# Altium PCB ArduinoDevBoard-v2.PcbDoc
Units mm, origin at the board's own origin, x right, y up, seen from the top; angles counter-clockwise.
Board outline 100 x 70 mm, 2 copper layers (Top Layer, Bottom Layer); 39 components, 34 nets, 129 pads, 0 vias.
Unrouted connection lines stored in the file: 49.
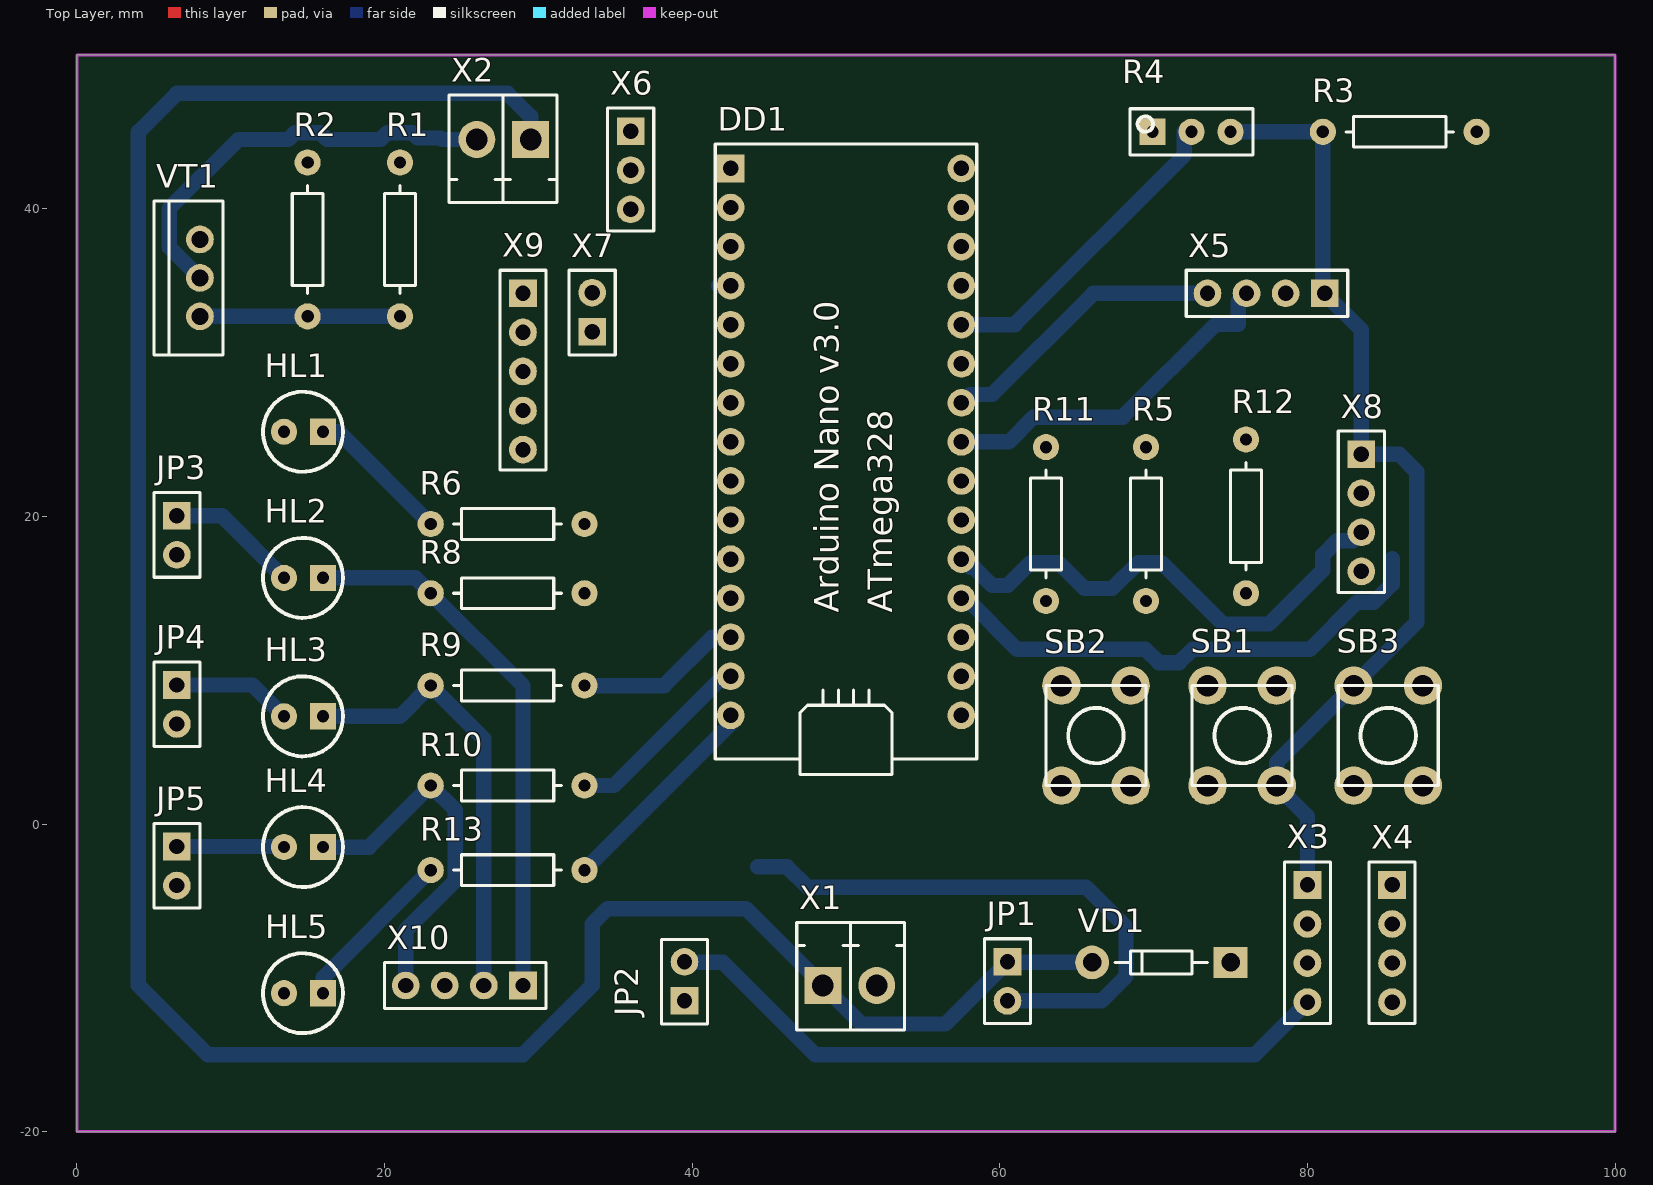
[diagram p0: Top Layer view]
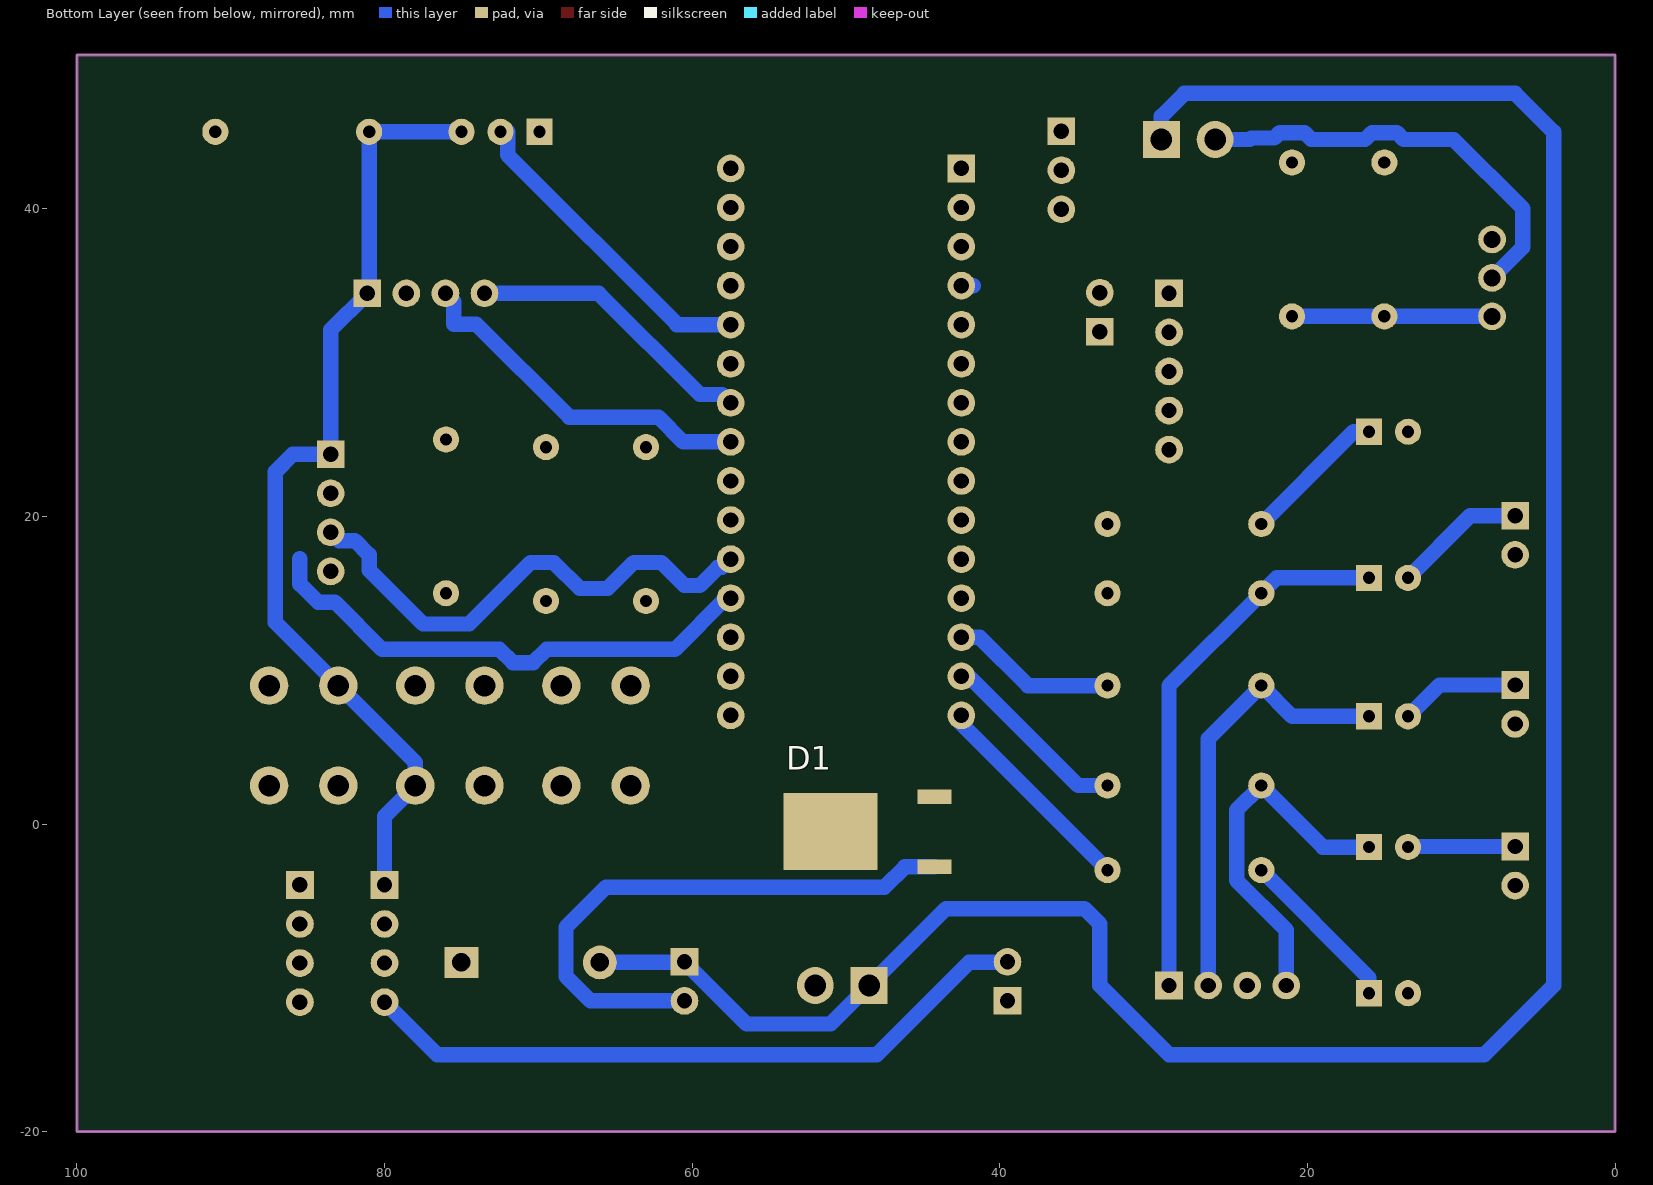
[diagram p1: Bottom Layer view, seen from below]

## Layer stack, top to bottom
Top Solder: solder mask 0.0102, Solder Resist, Dk 3.5
Top Layer: signal copper 0.0356
Dielectric 1: dielectric 0.32, FR-4, Dk 4.8
Bottom Layer: signal copper 0.0356
Bottom Solder: solder mask 0.0102, Solder Resist, Dk 3.5

## Board outline
0,-20 100,-20 100,50 0,50

## Design rules (kind name [scope] priority, off if disabled: settings)
Clearance [All] p1: gap=0.6 ignorepadtopadclearanceinfootprint=FALSE
PolygonConnect [All] p1: connectstyle=Relief reliefconductorwidth=0.254 reliefentries=4 polygonreliefangle="90 Angle" airgapwidth=0.254
RoutingVias [All] p1: holewidth=0.711 width=1.27 viastyle="Through Hole" minholewidth=0.711 minwidth=1.27 maxholewidth=0.711 maxwidth=1.27
SolderMaskExpansion [All] p1: expansion=0.102
Width [All] p1: maxlimit=1.2 minlimit=0.6 preferedwidth=1 toplayer_maxwidth=1 bottomlayer_minwidth=0.8 minimp=50.000000 maximp=50.000000 favimp=50.000000
30 further rules are at their usual default settings.

## Components (designator, comment, footprint, x,y, rotation, side; value= is the part's Value field where it differs from the comment)
D1 "L78M05" D-PAK 48.6,-0.5 r0 bottom
DD1 "ADUINO-NANO-V3.0-328" ARDUINO_NANO_V3.0 42.5,42.72 r0 top
HL1 "*" "Led Diode 5mm" 16,25.5 r180 top
HL2 "*" "Led Diode 5mm" 16,16 r180 top
HL3 "*" "Led Diode 5mm" 16,7 r180 top
HL4 "*" "Led Diode 5mm" 16,-1.5 r180 top
HL5 "*" "Led Diode 5mm" 16,-11 r180 top
JP1 "Jumper" PLS-2 60.5,-8.96 r270 top
JP2 "Jumper" PLS-2 39.5,-11.5 r90 top
JP3 "Jumper" PLS-2 6.5,20.04 r270 top
JP4 "Jumper" PLS-2 6.5,9.04 r270 top
JP5 "Jumper" PLS-2 6.5,-1.46 r270 top
R1 "100R" Resistor-0.25W 21,33 r90 top
R2 "1k" Resistor-0.25W 15,33 r90 top
R3 "4.7K" Resistor-0.25W 91,45 r180 top
R4 "1k" 3296W_Resistor 72.46,45 r0 top
R5 "10k" Resistor-0.25W 69.5,24.5 r270 top
R6 "100R" Resistor-0.25W 33,19.5 r180 top value=240R
R8 "100R" Resistor-0.25W 33,15 r180 top value=240R
R9 "100R" Resistor-0.25W 33,9 r180 top value=240R
R10 "100R" Resistor-0.25W 33,2.5 r180 top value=240R
R11 "10k" Resistor-0.25W 63,24.5 r270 top
R12 "10k" Resistor-0.25W 76,25 r270 top
R13 "100R" Resistor-0.25W 33,-3 r180 top value=240R
SB1 "*" KLS7-TS6601-5.0-180 73.5,2.5 r90 top
SB2 "*" KLS7-TS6601-5.0-180 68.5,9 r270 top
SB3 "*" KLS7-TS6601-5.0-180 87.5,9 r270 top
VD1 "1N4007" "Diode (DO41)" 70.5,-9 r180 top
VT1 "TIP122" TO220 8,35.5 r270 top
X1 "15EDGVC-3.5-2P" 15EDGVC-3.5-2P 48.5,-10.5 r0 top
X2 "15EDGVC-3.5-2P" 15EDGVC-3.5-2P 29.5,44.5 r180 top
X3 "PLS-4" PLS-4 80,-3.96 r270 top
X4 "PLS-4" PLS-4 85.5,-3.96 r270 top
X5 "PLS-4" PLS-4 81.12,34.5 r180 top
X6 "15EDGVC-3.5-3P" PLS-3 36,45.04 r270 top
X7 "*" PLS-2 33.5,32 r90 top
X8 "*" PLS-4 83.5,24.04 r270 top
X9 "*" PLS-5 29,34.5 r270 top
X10 "*" PLS-4 29,-10.5 r180 top

## Footprints (in the part's own frame and the unit in brackets; to place one, negate y for a bottom-side part, rotate by r counter-clockwise, add the part's x,y. Pads: shape width x height; smd on the part's side, far side on the other; paste and mask are expansions set on the pad)
15EDGVC-3.5-2P [mm]
  rect 2.4x2.4 hole 1.4 unplated: 1(0,0)
  round 2.4 hole 1.4: 2(3.5,0)
  silkscreen extent -1.7,-2.9 5.3,4.1
3296W_Resistor [mm]
  rect 1.7x1.7 hole 0.8: 1(-2.54,0)
  round 1.7 hole 0.8: 2(0,0) 3(2.54,0)
  silkscreen extent -4,-1.5 4,1.5, body extent -4.76,-2.4 4.77,2.4, height 11.55
ARDUINO_NANO_V3.0 [mm]
  rect 1.8x1.8 hole 1: 1(0,-0.1)
  round 1.8 hole 1: 2(0,-2.64) 3(0,-5.18) 4(0,-7.72) 5(0,-10.26) 6(0,-12.8) 7(0,-15.34) 8(0,-17.88) 9(0,-20.42) 10(0,-22.96) 11(0,-25.5) 12(0,-28.04) 13(0,-30.58) 14(0,-33.12) 15(0,-35.66) 16(15,-35.66) 17(15,-33.12) 18(15,-30.58) 19(15,-28.04) 20(15,-25.5) 21(15,-22.96) 22(15,-20.42) 23(15,-17.88) 24(15,-15.34) 25(15,-12.8) 26(15,-10.26) 27(15,-7.72) 28(15,-5.18) 29(15,-2.64) 30(15,-0.1)
  silkscreen extent -1,-39.5 16,1.5
D-PAK [mm] "TO-252AA"
  rect 2.2x0.95 smd: 1(-4.35,2.28) 2(-4.35,-2.28)
  rect 6.1x5 smd: 3(2.4,0)
  body extent -4.6,-3.25 5.3,3.25, height 2.5
"Diode (DO41)" [mm]
  rect 2.2x2 hole 1.2: 1(-4.5,0)
  round 2.2 hole 1.2: 2(4.5,0)
  silkscreen extent -3,-0.75 3,0.75
KLS7-TS6601-5.0-180 [mm]
  round 2.5 hole 1.4: 1(0,0) 2(6.5,0) 3(0,-4.5) 4(6.5,-4.5)
  silkscreen extent 0,-5.5 6.5,1
"Led Diode 5mm" [mm]
  rect 1.7x1.7 hole 0.8: 1(0,0)
  round 1.7 hole 0.8: 2(2.54,0)
  silkscreen extent -1.3,-2.6 3.9,2.6, body extent -1.5,-2.8 3.89,3, height 8.5
PLS-2 [mm]
  rect 1.8x1.8 hole 1: 1(0,0)
  round 1.8 hole 1: 2(2.54,0)
  silkscreen extent -1.5,-1.5 4,1.5, body extent -1.29,-1.25 3.79,1.29, height 8.54
PLS-3 [mm]
  rect 1.8x1.8 hole 1: 1(0,0)
  round 1.8 hole 1: 2(2.54,0) 3(5.08,0)
  silkscreen extent -1.5,-1.5 6.5,1.5, body extent -1.25,-1.25 6.37,1.29, height 8.54
PLS-4 [mm]
  rect 1.8x1.8 hole 1: 1(0,0)
  round 1.8 hole 1: 2(2.54,0) 3(5.08,0) 4(7.62,0)
  silkscreen extent -1.5,-1.5 9,1.5
PLS-5 [mm]
  rect 1.8x1.8 hole 1: 1(0,0)
  round 1.8 hole 1: 2(2.54,0) 3(5.08,0) 4(7.62,0) 5(10.16,0)
  silkscreen extent -1.5,-1.5 11.5,1.5
Resistor-0.25W [mm]
  round 1.7 hole 0.8: 1(0,0) 2(10,0)
  silkscreen extent 1.5,-1 8.5,1, body extent -0.3,-1.16 10.46,1.16, height 2.93
TO220 [mm]
  round 1.8 hole 1.1: 1(2.5,0) 2(0,0) 3(-2.5,0)
  silkscreen extent -5,-3 5,1.5

## Part data
DD1: library part ARDUINO-NANO-V3.0-328
HL1 HL2 HL3 HL4 HL5: library part Led-5mm
R1 R2 R3 R5 R6 R8 R9 R10 R11 R12 R13: library part "Resistor 0.25W", "=Power"
R4: library part 3296W, "3296", Case=3296W
SB1 SB2 SB3: library part KLS7-TS6601-5.0-180
VD1: "1A, 1000V"
VT1: "PNP Transistor"
X1 X2 X7: library part Connector-2Pin
  X1 X2: Case=15EDGVC-3.5-2P
X3 X4 X5 X8 X10: library part Connector-4Pin
  X3 X4 X5: Case=PLS-4
X6: library part Connector-3Pin, Case=15EDGVC-3.5-3P
X9: library part Connector-5Pin

## Nets (pads, with @x,y where several pads share a name; then routed paths per layer and width w, separated by ;. In a path a pad name is that pad's centre, name@x,y a point inside that pad or via, vN(x,y) a via of type N, cw(c..) or ccw(c..) an arc to the next point about the centre after c; other vN are vias at no path point)
+5V: DD1.27 JP2.2 R3.2 R4.3 SB1.3 SB2.3 SB3.3 X3.1 X3.2 X3.3 X3.4 X5.1 X6.3 X8.1 X9.1 | length 108
  Bottom Layer w1: X6.3@35.881,39.96 X6.3 ; JP2.2@39.5,-9 42,-9 48,-15 76.58,-15 X3.4 ; R4.3 R3.2 81,34.62 X5.1 83.5,32.12 X8.1 85.96,24.04 87.1,22.9 87.1,13.1 SB3.3 78,4 SB1.3 80,0.5 X3.1
+12V: JP1.1 VD1.2 X1.1 X2.1 | length 159.1
  Bottom Layer w1: X2.1 29.5,46 28,47.5 6.5,47.5 4,45 4,-10.5 8.5,-15 29,-15 33.5,-10.5 33.5,-6.5 34.5,-5.5 43.5,-5.5 X1.1 51,-13 56.46,-13 JP1.1 60.54,-9 VD1.2
GND: D1.3 DD1.4 DD1.29 HL1.2 HL5.2 JP3.2 JP4.2 JP5.2 R2.2 R3.1 R4.1 R5.1 R11.1 R12.1 VD1.1 VT1.3 X1.2 X4.1 X4.2 X4.3 X4.4 X5.2 X6.1 X7.2 X8.4 X9.2 X10.3 | length 0.8
  Bottom Layer w1: DD1.4@41.733,35 DD1.4
NetD1_1: D1.1 JP1.2 | length 37.1
  Bottom Layer w1: D1.1 46.174,-2.78 47.494,-4.1 65.6,-4.1 68.2,-6.7 68.2,-9.911 66.611,-11.5 JP1.2
NetD1_2: D1.2 JP2.1
NetDD1_5: DD1.5 X6.2
NetDD1_6: DD1.6 R1.2
NetDD1_7: DD1.7 X7.1
NetDD1_8: DD1.8 X9.3
NetDD1_9: DD1.9 X9.4
NetDD1_10: DD1.10 X9.5
NetDD1_11: DD1.11 R6.1 | length 0.3
  Bottom Layer w1: R6.1 R6.1@33.22,19.72
NetDD1_12: DD1.12 R8.1
NetDD1_13: DD1.13 R9.1 | length 10.8
  Bottom Layer w1: R9.1 38.177,9 41.317,12.14 DD1.13
NetDD1_14: DD1.14 R10.1 | length 12.4
  Bottom Layer w1: R10.1@33,2.6 R10.1 34.909,2.5 DD1.14@42.255,9.845
NetDD1_15: DD1.15 R13.1 | length 14
  Bottom Layer w1: R13.1 42.5,6.5 DD1.15
NetDD1_16: DD1.16 R5.2 SB3.1
NetDD1_19: DD1.19 X8.2 | length 33.5
  Bottom Layer w1: DD1.19 57.8,14.68 61.13,11.35 69.473,11.35 70.337,10.486 71.663,10.486 72.527,11.35 80.163,11.35 83.233,14.42 84.328,14.42 85.5,15.592 85.5,17.248
NetDD1_20: DD1.20 X8.3 | length 33.7
  Bottom Layer w1: DD1.20 DD1.20@57.522,17.22 ; DD1.20@57.511,17.231 DD1.20@57.522,17.22 ; DD1.20@57.78,17.22 DD1.20@57.522,17.22 ; X8.3 82.96,18.42 81.92,18.42 81,17.5 81,16.5 77.5,13 74.5,13 70.5,17 69,17 67.308,15.308 65.5,15.308 63.808,17 62,17 60.508,15.508 59.5,15.508 58.328,16.68 58.062,16.68 DD1.20@57.522,17.22
NetDD1_21: DD1.21 R12.2 SB1.1 | length 0.4
  Bottom Layer w1: DD1.21 DD1.21@57.76,19.5
NetDD1_22: DD1.22 R11.2 SB2.1
NetDD1_23: DD1.23 X5.3 | length 23.4
  Bottom Layer w1: DD1.23 60.582,24.84 62.192,26.45 67.99,26.45 74.04,32.5 75.5,32.5 75.5,33.96 X5.3
NetDD1_24: DD1.24 X5.4 | length 18.9
  Bottom Layer w1: DD1.24 58.04,27.92 59.5,27.92 66.08,34.5 X5.4
NetDD1_26: DD1.26 R4.2 | length 20.8
  Bottom Layer w1: DD1.26 61,32.46 ; 61,32.5 72,43.5 R4.2@72,45 ; R4.2@72.46,44.774 R4.2
NetHL1_1: HL1.1 R6.2 | length 9.5
  Bottom Layer w1: HL1.1 17,25.5 R6.2
NetHL2_1: HL2.1 R8.2 X10.1 | length 35.4
  Bottom Layer w1: HL2.1 22,16 R8.2 29,9 X10.1
NetHL2_2: HL2.2 JP3.1 | length 8.6
  Bottom Layer w1: JP3.1 9.42,20.04 HL2.2
NetHL3_1: HL3.1 R9.2 X10.2 | length 28.8
  Bottom Layer w1: HL3.1 21,7 R9.2 26.46,5.54 X10.2
NetHL3_2: HL3.2 JP4.1 | length 7.8
  Bottom Layer w1: JP4.1 11.42,9.04 HL3.2
NetHL4_1: HL4.1 R10.2 X10.4 | length 23.7
  Bottom Layer w1: HL4.1 19,-1.5 R10.2 24.604,0.896 24.604,-3.664 21.38,-6.888 X10.4
NetHL4_2: HL4.2 JP5.1 | length 7
  Bottom Layer w1: JP5.1 13.42,-1.46 HL4.2
NetHL5_1: HL5.1 R13.2 | length 10.9
  Bottom Layer w1: HL5.1 16,-10 R13.2
NetR1_1: R1.1 R2.1 VT1.1 | length 13
  Bottom Layer w1: VT1.1 R2.1 R1.1
NetVT1_C: VT1.2 X2.2 | length 27.9
  Bottom Layer w1: VT1.2 6,37.5 6,40 10.5,44.5 13.742,44.5 14.192,44.95 15.808,44.95 16.258,44.5 19.742,44.5 20.192,44.95 21.808,44.95 22.158,44.6 23.663,44.6 23.763,44.5 X2.2
pads on no net: DD1.1 DD1.2 DD1.3 DD1.17 DD1.18 DD1.25 DD1.28 DD1.30 SB1.2 SB1.4 SB2.2 SB2.4 SB3.2 SB3.4

## Keep-outs
Keep-Out Layer:
  the board outline again, w0.2

## Silkscreen, mask and mechanical layers (free items; w line width, h text height)
Border:
  the board outline again, w0.2

## Dimensions
-1,-20 to 0,50 on Size
0,50 to 100,50 on Size

## Text inside footprints (layer, text, board x,y; h text height)
DD1: Top Overlay "ATmega328" at 53,13.72 h1.59 r90; Top Overlay "Arduino Nano v3.0" at 49.539,13.72 h1.59 r90